# Altium PCB PIAR_MainBoard.PcbDoc (part 1 of 3)
Units mil, origin at the board's own origin, x right, y up, seen from the top; angles counter-clockwise.
Board outline 3543.31 x 2165.35 mil, 2 copper layers (Top Layer, Bottom Layer), stack 61.811 mil thick; 79 components, 51 nets, 291 pads, 72 vias.
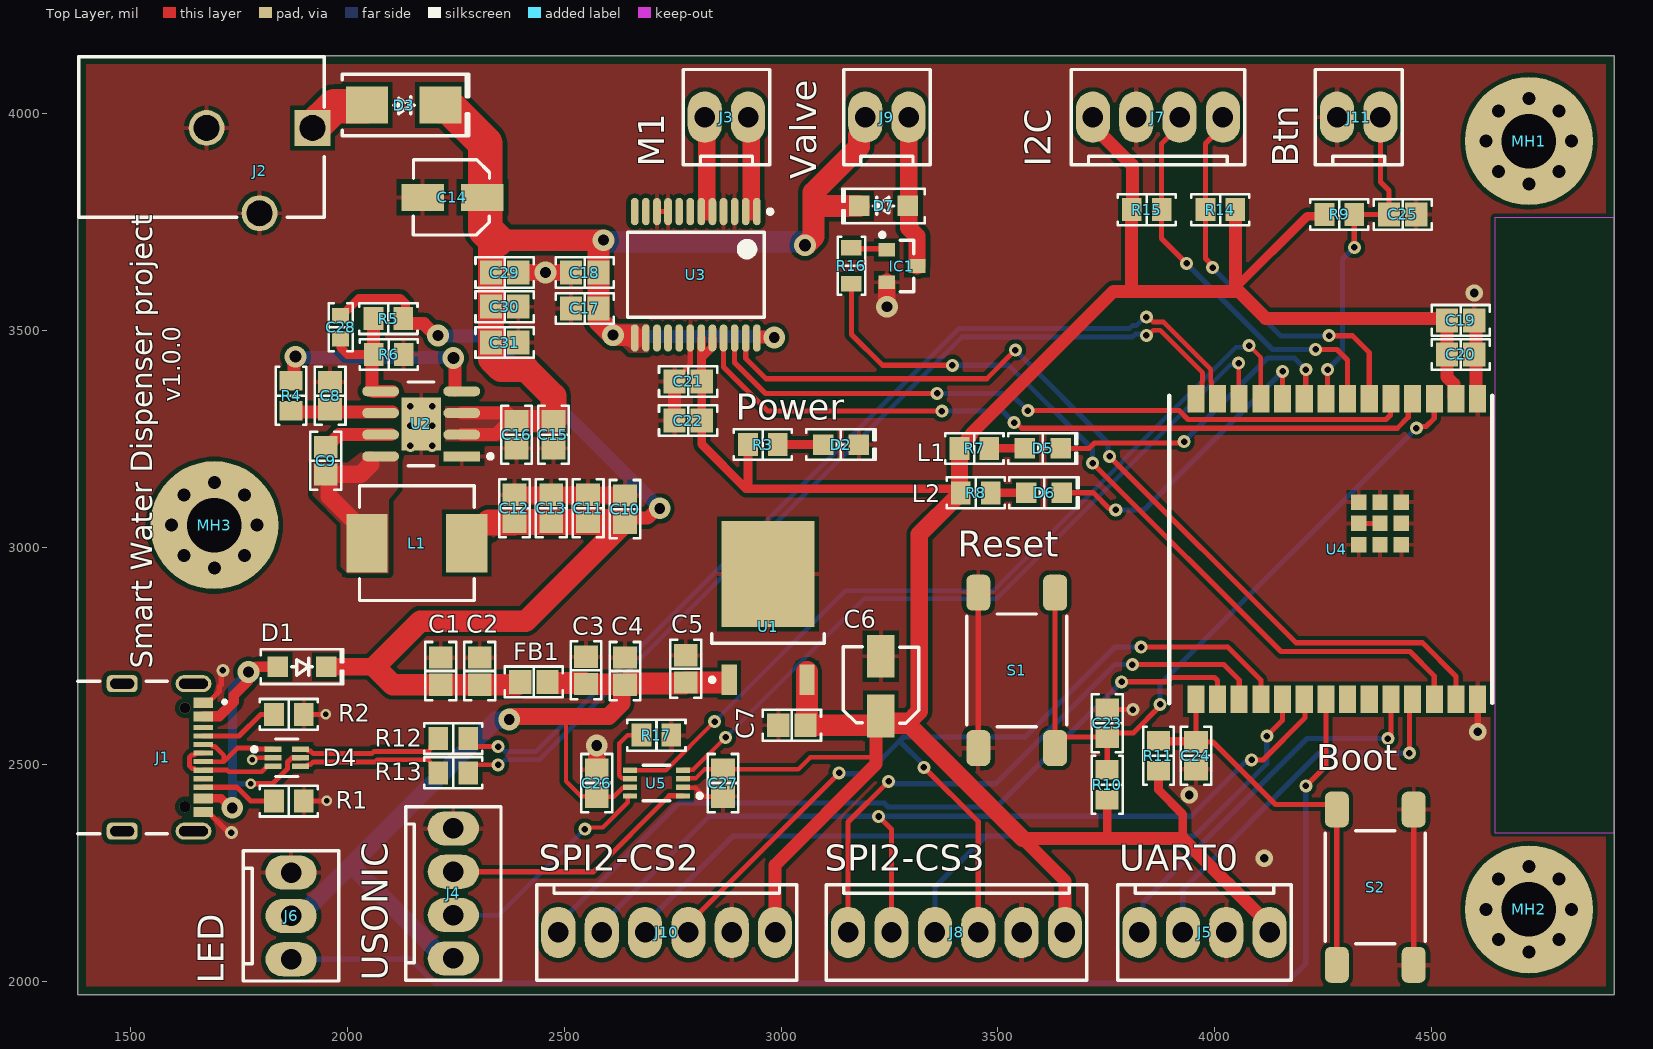
[diagram p0: Top Layer view]
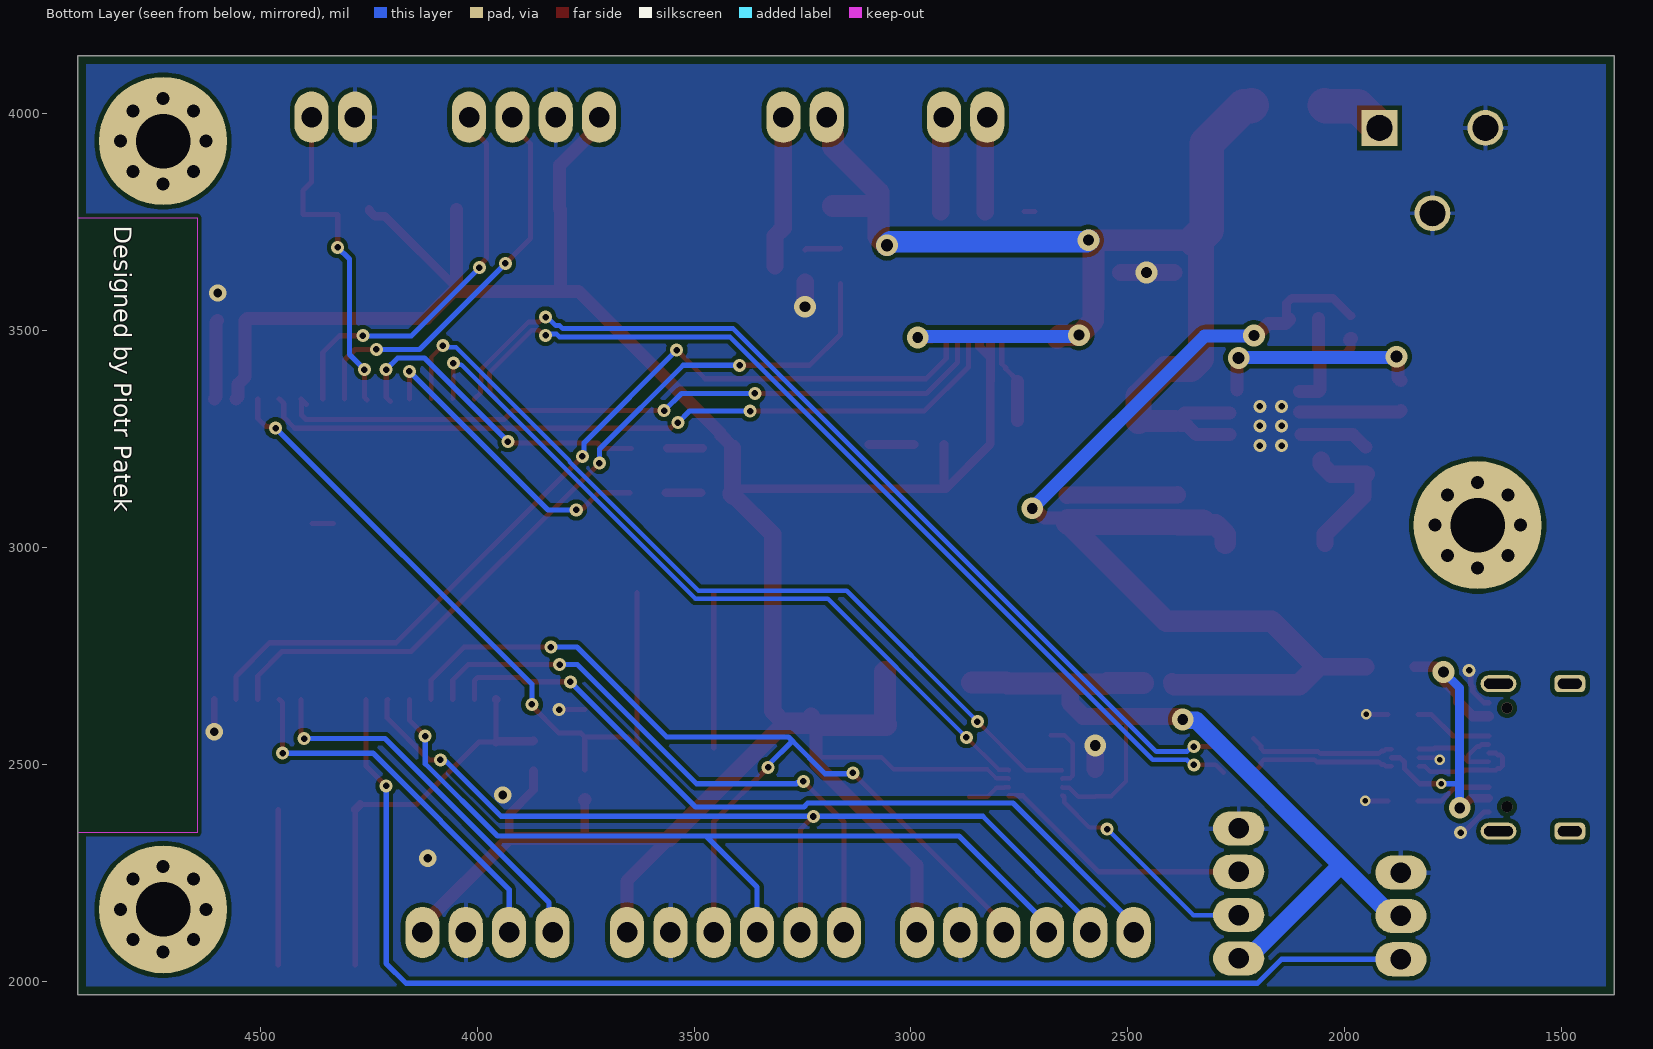
[diagram p1: Bottom Layer view, seen from below]
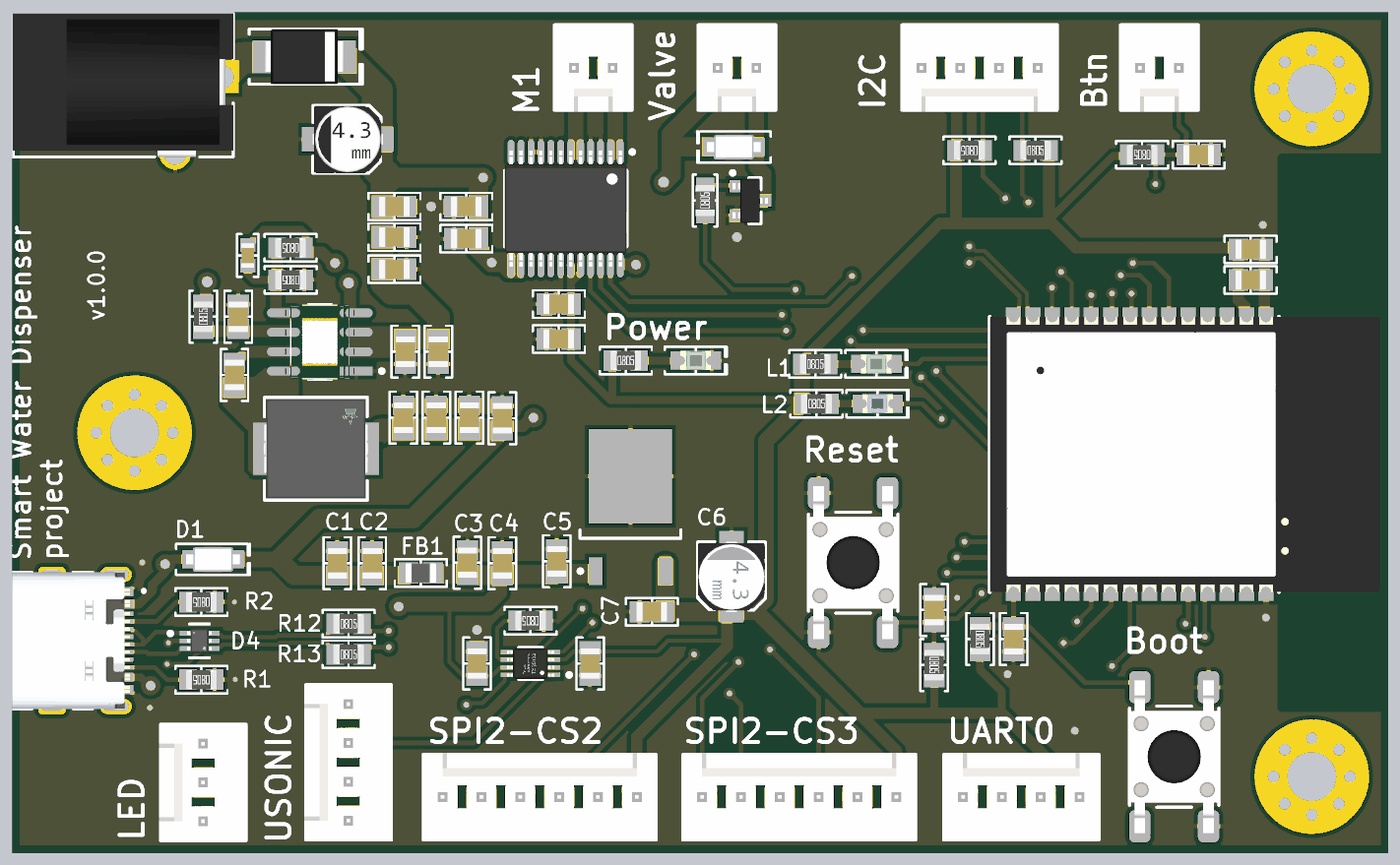
[diagram p3: 3D render of the assembled board from above, using the file's embedded part models]

## Layer stack, top to bottom
Top Solder: solder mask 0.3937, Solder Resist, Dk 3.5
Top Layer: signal copper 1.378
Dielectric 1: dielectric 59.0551, FR-4, Dk 4.5
Bottom Layer: signal copper 1.378
Bottom Solder: solder mask 0.3937, Solder Resist, Dk 3.5

## Board outline
1377.95,1968.5 4921.26,1968.5 4921.26,4133.86 1377.95,4133.86

## Design rules (kind name [scope] priority, off if disabled: settings)
Clearance ClearanceMountingHole [InComponentClass('MountingHoles')] p1: gap=10 ignorepadtopadclearanceinfootprint=TRUE except(12: Arc-Hole Track-Hole; 20: Arc-THPad Track-THPad SMDPad-THPad THPad-THPad THPad-Via THPad-Fill THPad-Poly THPad-Region THPad-Text THPad-Hole)
Clearance OutsideLayersClearance [OnOutside] p2: gap=10 ignorepadtopadclearanceinfootprint=TRUE except(3.94: Arc-SMDPad Track-SMDPad; 8: Arc-Arc Arc-Track Track-Track SMDPad-SMDPad; 12: Arc-THPad Track-THPad SMDPad-THPad THPad-Via; 18: THPad-THPad)
Clearance InnerLayersClearance [All] p3: gap=10 ignorepadtopadclearanceinfootprint=TRUE except(8: Arc-Arc Arc-Track Arc-SMDPad Track-Track Track-SMDPad SMDPad-SMDPad; 12: Arc-THPad Arc-Hole Track-THPad Track-Hole SMDPad-THPad THPad-Via THPad-Fill THPad-Poly THPad-Region Via-Via; 18: THPad-THPad)
DiffPairsRouting [InDifferentialPair('USB_CONN_D')] p1: maxlimit=8 minlimit=8 mostfreqgap=8 toplayer_minwidth=11.07 toplayer_maxwidth=11.07 toplayer_prefwidth=11.07 bottomlayer_minwidth=11.07 bottomlayer_maxwidth=11.07 bottomlayer_prefwidth=11.07 maxuncoupledlength=500
DiffPairsRouting DiffPairsRouting_1 [InDifferentialPair('USB_D')] p2: maxlimit=8 minlimit=8 mostfreqgap=8 toplayer_minwidth=11.07 toplayer_maxwidth=11.07 toplayer_prefwidth=11.07 bottomlayer_minwidth=11.07 bottomlayer_maxwidth=11.07 bottomlayer_prefwidth=11.07 maxuncoupledlength=500
DiffPairsRouting DiffPairsRouting_2 [InDifferentialPair('USB_D_R')] p3: maxlimit=8 minlimit=8 mostfreqgap=8 toplayer_minwidth=11.07 toplayer_maxwidth=11.07 toplayer_prefwidth=11.07 bottomlayer_minwidth=11.07 bottomlayer_maxwidth=11.07 bottomlayer_prefwidth=11.07 maxuncoupledlength=500
HoleSize [All] p1: absolutevalues=TRUE maxlimit=196.85 minlimit=11.81 maxpercent=80.000 minpercent=20.000
HoleToHoleClearance PadToPadClearance [IsPad] p1: gap=17.72 allowstackedmicrovias=TRUE
HoleToHoleClearance [All] p2: gap=10 allowstackedmicrovias=TRUE
MinimumSolderMaskSliver [All] p1: minsoldermaskwidth=3.94
PolygonConnect PolygonConnect_1 [InNetClass('Power')] p1: connectstyle=Direct reliefconductorwidth=10 reliefentries=4 polygonreliefangle="90 Angle" airgapwidth=10
PolygonConnect PowerPolygonConnect [InComponentClass('PowerComponents') or (IsVia and (InNetClass('HighPowerNets') or InNetClass('DirectConnectionPolygonNets'))) Or InPadClass('ThermalPads')] p2: connectstyle=Direct reliefconductorwidth=10 reliefentries=4 polygonreliefangle="90 Angle" airgapwidth=10
PolygonConnect PolygonConnectGNDVia [InNet('GND') vs IsVia] p3: connectstyle=Direct reliefconductorwidth=10 reliefentries=4 polygonreliefangle="90 Angle" airgapwidth=10
PolygonConnect [All] p4: connectstyle=Relief reliefconductorwidth=10 reliefentries=4 polygonreliefangle="90 Angle" airgapwidth=10
RoutingVias [All] p1: holewidth=12 width=24 viastyle="Through Hole" minholewidth=12 minwidth=24 maxholewidth=50 maxwidth=50
SilkToSilkClearance [All] p1: silktosilkclearance=5.91
SilkToSolderMaskClearance [IsText] p1: minsilkscreentomaskgap=5.91 clearancetoexposedcopper=TRUE
SolderMaskExpansion [InNetClass('HighPowerNets')] p1: expansion=1.97 istentingtop=FALSE
SolderMaskExpansion TantedViasMaskExpansion [IsVia And (Not InNetClass('HighPowerNets') or IsBlindVia)] p2: expansion=4 istentingtop=TRUE
SolderMaskExpansion PadsMaskExpansion [All] p3: expansion=2 istentingtop=FALSE
SupplyNets "Schematic Supply Nets_3" [InNet('+5V')] p1: voltage=0.000
SupplyNets "Schematic Supply Nets_2" [InNet('+12V')] p2: voltage=0.000
SupplyNets "Schematic Supply Nets_1" [InNet('+3.3V')] p3: voltage=0.000
SupplyNets "Schematic Supply Nets_11" [InNet('GND')] p4: voltage=0.000
Width [All] p1: maxlimit=100 minlimit=8 preferedwidth=10 minimp=50.000000 maximp=50.000000 favimp=50.000000
Width Width2 [InNet('3V3')] p2: maxlimit=40 minlimit=10 preferedwidth=20
Width Width3 [InNet('3.3VA')] p3: maxlimit=40 minlimit=10 preferedwidth=20
24 further rules are at their usual default settings.

## Classes and differential pairs
component class Motherboard: C17 C18 C19 C20 C21 C22 C23 C24 C25 C26 C27 D5 D6 D7 IC1 J3 J4 J5 J6 J7 J8 J9 J10 J11 R7 R8 R9 R10 R11 R12 R13 R14 R15 R16 R17 S1 S2 U3 U4 U5
component class ConnectionsAndPower: C1 C2 C3 C4 C5 C6 C7 C8 C9 C10 C11 C12 C13 C14 C15 C16 C28 C29 C30 C31 D1 D2 D3 D4 FB1 J1 J2 L1 MH1 MH2 MH3 R1 R2 R3 R4 R5 R6 U1 U2
differential pair USB_D_R: +USB_D_R_P -USB_D_R_N
differential pair USB_D: +USB_D_P -USB_D_N
differential pair USB_CONN_D: +USB_CONN_D_P -USB_CONN_D_N

## Components (designator, comment, footprint, x,y, rotation, side; value= is the part's Value field where it differs from the comment)
C1 "47 µF" "CAP 0805_2012" 2215,2715 r270 top
C2 "47 µF" "CAP 0805_2012" 2305,2715 r270 top
C3 "47 µF" "CAP 0805_2012" 2550,2716.5 r270 top
C4 "47 µF" "CAP 0805_2012" 2640,2715 r270 top
C5 "0.33µF" "CAP 0805_2012" 2780,2720 r270 top
C6 "10uF" "CAP ALSMD POLY 4.3MM H5.5MM" 3230,2680 r90 top value=10µF
C7 "0.22 µF" "CAP 0805_2012" 3025,2590 r0 top
C8 "1µF" "CAP 0805_2012" 1960,3350 r270 top
C9 "0.1 µF" "CAP 0805_2012" 1950,3200 r90 top
C10 "22 µF" "CAP 0805_2012" 2640,3088.5 r270 top
C11 "22 µF" "CAP 0805_2012" 2555,3090 r270 top
C12 "22 µF" "CAP 0805_2012" 2385,3090 r270 top
C13 "22 µF" "CAP 0805_2012" 2470,3090 r270 top
C14 "47 µF" "CAP ALSMD 4.3MM H5.4MM" 2242.13,3807.09 r180 top
C15 "10 µF" "CAP 0805_2012" 2475,3260 r90 top
C16 "0.22 µF" "CAP 0805_2012" 2390,3260 r90 top
C17 "0.1 µF" "CAP 0805_2012" 2547.24,3551.18 r180 top
C18 "10 µF" "CAP 0805_2012" 2547.24,3633.86 r0 top
C19 "22 µF" "CAP 0805_2012" 4566.93,3523.62 r0 top
C20 "0.1 µF" "CAP 0805_2012" 4566.93,3444.88 r0 top
C21 "10 µF" "CAP 0805_2012" 2785.35,3382.68 r0 top
C22 "0.1 µF" "CAP 0805_2012" 2785.35,3292.68 r180 top
C23 "0.1 µF" "CAP 0805_2012" 3751.97,2594.49 r270 top
C24 "0.1 µF" "CAP 0805_2012" 3956.69,2519.68 r90 top
C25 "0.1 µF" "CAP 0805_2012" 4433.07,3767.72 r180 top
C26 "0.1 µF" "CAP 0805_2012" 2574.8,2456.69 r90 top
C27 "0.1 µF" "CAP 0805_2012" 2866.14,2456.69 r90 top
C28 "0.1 µF" "CAP 0603_1608" 1984.25,3507.87 r90 top
C29 "22 µF" "CAP 0805_2012" 2362.2,3633.86 r180 top
C30 "22 µF" "CAP 0805_2012" 2362.2,3555.12 r180 top
C31 "22 µF" "CAP 0805_2012" 2362.2,3472.44 r180 top
D1 "STPS2H100ZF" SOD123F 1895,2725 r0 top
D2 "Green" "LED 0805_2012 GREEN" 3137.99,3237.2 r0 top
D3 "STTH4R02UY" "DO214AA SMB" 2130,4020 r0 top
D4 "USBLC6-2P6" FP-SOT-666-MFG 1860,2515 r0 top
D5 "Green" "LED 0805_2012 GREEN" 3603.31,3228.35 r0 top
D6 "Blue" "LED 0805_2012 BLUE" 3606.3,3125.98 r0 top
D7 "RF071MM2STR" SOD123F 3236.22,3787.4 r180 top
FB1 "120 Ohms @ 100MHz" "FER 0805_2012" 2430,2690 r0 top
IC1 "BSR202NL6327HTSA1" "INFINEON SOT-23-3" 3278.46,3648.82 r0 top
J1 "USB4105-GF-A-120" USB4105-GF-A-120 1480.32,2515.75 r270 top
J2 "PJ-102AH" "CUI PJ-102AH" 1663.39,3955.71 r90 top
J3 "M1" "MOLEX KK 0022272021" 2874.02,3992.13 r0 top
J4 "USONIC" "MOLEX KK 0022272041" 2244.09,2202.17 r270 top
J5 "UART1" "MOLEX KK 0022272041" 3976.38,2112.2 r180 top
J6 "LED1" "MOLEX KK 0022272031" 1870.08,2150.2 r270 top
J7 "DISPLAY1" "MOLEX KK 0022272041" 3868.9,3992.13 r0 top
J8 "NFC1" "MOLEX KK 0022272061" 3404.53,2112.2 r180 top
J9 "VALVE1" "MOLEX KK 0022272021" 3244.09,3992.13 r0 top
J10 "NFC2" "MOLEX KK 0022272061" 2736.22,2112.2 r180 top
J11 "Button" "MOLEX KK 0022272021" 4331.89,3992.13 r0 top
L1 "8.2uH" FP-IHLP-2525CZ-FP_2_413x3-MFG 2160,3010 r0 top
MH1 "M3 Mounting Hole" M3_MOUNTING_HOLE 4724.41,3937.01 r0 top
MH2 "M3 Mounting Hole" M3_MOUNTING_HOLE 4724.41,2165.35 r0 top
MH3 "M3 Mounting Hole" M3_MOUNTING_HOLE 1692.91,3051.18 r0 top
R1 "5.1k" "RES 0805_2012" 1865,2415 r180 top
R2 "5.1k" "RES 0805_2012" 1865,2615 r180 top
R3 "470" "RES 0805_2012" 2957.99,3237.2 r0 top
R4 "100k" "RES 0805_2012" 1870,3350 r90 top
R5 "100k" "RES 0805_2012" 2094.49,3527.56 r180 top
R6 "24.9k" "RES 0805_2012" 2095,3445 r180 top
R7 "470" "RES 0805_2012" 3445.83,3228.35 r0 top
R8 "47" "RES 0805_2012" 3448.82,3125.98 r0 top
R9 "10k" "RES 0805_2012" 4287.4,3767.72 r180 top
R10 "10k" "RES 0805_2012" 3751.97,2452.76 r270 top
R11 "10k" "RES 0805_2012" 3870.08,2519.68 r270 top
R12 "22" "RES 0805_2012" 2244.09,2559.06 r0 top
R13 "22" "RES 0805_2012" 2244.09,2480.32 r0 top
R14 "4k7" "RES 0805_2012" 4012.95,3778.74 r0 top
R15 "4k7" "RES 0805_2012" 3842.95,3778.74 r180 top
R16 "160" "YAGEO RES 0805_2012" 3162.2,3649.45 r90 top
R17 "10k" "RES 0805_2012" 2712.6,2566.93 r180 top
S1 "FSM6JSMAASTR" "TE FSM6JSMA" 3543.31,2716.54 r180 top
S2 "FSM6JSMAASTR" "TE FSM6JSMA" 4370.08,2216.54 r180 top
U1 "LD29150DT33R" TO-252_L 2970,2860 r90 top
U2 "LMR33630ADDAR" FP-DDA0008J-IPC_B 2170,3285 r180 top
U3 "TB6612FNG" TOSH-SSOP-24_M 2803.23,3628.74 r270 top
U4 "ESP32-C6-WROOM-1" ESP32-C6-WROOM1 4273.62,3092.52 r270 top
U5 "TXS0102DCUR" FP-DCU0008A-MFG 2712.6,2456.69 r180 top

## Footprints (in the part's own frame and the unit in brackets; to place one, negate y for a bottom-side part, rotate by r counter-clockwise, add the part's x,y. Pads: shape width x height; smd on the part's side, far side on the other; paste and mask are expansions set on the pad)
"CAP 0603_1608" [mm] "Chip Capacitor, 2-Leads, Body 1.60x0.80mm, IPC Medium Density"
  rect 0.9x1 smd: 1(-0.675,0) 2(0.675,0)
  silkscreen extent -1.4,-0.7 1.4,0.7, body extent -0.8,-0.41 0.8,0.41, height 0.82
"CAP 0805_2012" [mm] "Chip Capacitor, 2-Leads, Body 2.00x1.20mm, IPC Medium Density"
  rect 1.3x1.4 smd: 1(-0.8,0) 2(0.8,0)
  silkscreen extent -1.7,-0.9 1.7,0.9, body extent -1,-0.64 1,0.64, height 1.26
"CAP ALSMD 4.3MM H5.4MM" [mm] "Aluminum Electrolytic Capacitor, Body 4.30x4.30x5.40mm, IPC Low Density"
  rect 2.5x1.6 smd: 1(-1.75,0) 2(1.75,0)
  silkscreen extent -2.17,-2.21 2.3,2.2, body extent -2.3,-2.2 2.3,2.2, height 5.4
"CAP ALSMD POLY 4.3MM H5.5MM" [mm] "Aluminum Polymer Capacitor, Body 4.30x4.30x5.50mm, IPC Low Density"
  rect 2.5x1.6 smd: 1(-1.75,0) 2(1.75,0)
  silkscreen extent -2.17,-2.21 2.3,2.2, body extent -2.3,-2.2 2.3,2.2, height 5.5
"CUI PJ-102AH" [mm] "DC Barrel Jack W/ Switch 2.0x5.5"
  rect 2.1x2.1 hole 1.5: 1(0.3,-6.5)
  round 2.1 hole 1.5: 2(0.3,-0.3) 3(-4.7,-3.4)
  silkscreen extent -4.92,-7.2 4.47,7.2, body extent -4.92,-7.2 4.47,7.2, height 11
"DO214AA SMB" [mm] "Molded Diode, 2-Leads, Body 4.31x3.62mm, IPC Medium Density"
  rect 2.45x2.15 smd: 1(-2.15,0) 2(2.15,0)
  silkscreen extent -3.6,-1.8 3.8,1.8, body extent -2.6,-1.8 2.6,1.8, height 2.4
ESP32-C6-WROOM1 [mm]
  rect 1.6x1 smd: 1(-6.35,8.45) 2(-6.35,7.18) 3(-6.35,5.91) 4(-6.35,4.64) 5(-6.35,3.37) 6(-6.35,2.1) 7(-6.35,0.83) 8(-6.35,-0.44) 9(-6.35,-1.71) 10(-6.35,-2.98) 11(-6.35,-4.25) 12(-6.35,-5.52) 13(-6.35,-6.79) 14(-6.35,-8.06) 15(11.25,-8.06) 16(11.25,-6.79) 17(11.25,-5.52) 18(11.25,-4.25) 19(11.25,-2.98) 20(11.25,-1.71) 21(11.25,-0.44) 22(11.25,0.83) 23(11.25,2.1) 24(11.25,3.37) 25(11.25,4.64) 26(11.25,5.91) 27(11.25,7.18) 28(11.25,8.45)
  rect 0.9x0.9 smd: 29(-0.305,3.98) 29(-0.305,2.73) 29(-0.305,1.48) 29(0.945,3.98) 29(0.945,2.73) 29(0.945,1.48) 29(2.195,3.98) 29(2.195,1.48) 29(2.195,2.73)
  silkscreen extent -6.54,-9.61 11.47,9.31, body extent -6.54,-9.6 11.48,15.9, height 3.1
"FER 0805_2012" [mm] "Chip Ferrite, 2-Leads, Body 2.00x1.20mm, IPC Medium Density"
  rect 1.3x1.4 smd: 1(-0.8,0) 2(0.8,0)
  silkscreen extent -1.7,-0.9 1.7,0.9, body extent -1,-0.64 1,0.64, height 1.26
FP-DCU0008A-MFG [mm]
  rect 0.8x0.3 smd paste-1000 mask+0: 1(-1.55,0.75) 2(-1.55,0.25) 3(-1.55,-0.25) 4(-1.55,-0.75) 5(1.55,-0.75) 6(1.55,-0.25) 7(1.55,0.25) 8(1.55,0.75)
  silkscreen extent -2.65,-1.05 0.77,1.05, body extent -2.05,-1.3 2.05,1.3, height 0.25
FP-DDA0008J-IPC_B [mm]
  rect 2.153x0.582 smd paste+0 mask+0: 1(-2.377,1.905)
  rrect100% 2.153x0.582 smd paste+0 mask+0: 2(-2.377,0.635) 3(-2.377,-0.635) 4(-2.377,-1.905) 5(2.377,-1.905) 6(2.377,-0.635) 7(2.377,0.635) 8(2.377,1.905)
  rect 2.3x3.1 smd paste-1000 mask+0: 9(0,0)
  silkscreen extent -4.18,-2.45 0.75,2.45, body extent -3.7,-2.7 3.7,2.7, height 0.25
FP-IHLP-2525CZ-FP_2_413x3-MFG [mil]
  rect 95x135 smd paste+0 mask+0: 1(-115,0) 2(115,0)
  silkscreen extent -132,-132 132,132, body extent -166,-136 166,136, height 10
FP-SOT-666-MFG [mm]
  rect 0.99x0.3 smd paste+0 mask+0: 1(-0.805,0.5) 2(-0.805,0) 3(-0.805,-0.5) 4(0.805,-0.5) 5(0.805,0) 6(0.805,0.5)
  silkscreen extent -2.02,-1.1 0.65,1.1, body extent -1.4,-0.95 1.4,0.95, height 0.25
"INFINEON SOT-23-3" [mm] "SOT23, 3-Leads, Body 2.90x2.40mm, Pitch 0.95mm, IPC Medium Density"
  rect 0.972x0.802 smd: 1(-0.885,0.95) 2(-0.885,-0.95) 3(0.885,0)
  silkscreen extent -1.27,-1.5 0.7,1.95, body extent -1.16,-1.45 1.16,1.45, height 1
"LED 0805_2012 BLUE" [mm] "Chip Diode, 2-Leads, Body 2.00x1.25mm, IPC Medium Density"
  rect 1.2x1.2 smd: 1(-1.05,0) 2(1.05,0)
  silkscreen extent -2.03,-0.9 2.03,0.9, body extent -1,-0.62 1,0.63, height 0.9
"LED 0805_2012 GREEN" [mm] "Chip Diode, 2-Leads, Body 2.00x1.25mm, IPC Medium Density"
  rect 1.2x1.2 smd: 1(-1.05,0) 2(1.05,0)
  silkscreen extent -2.03,-0.9 2.03,0.9, body extent -1,-0.62 1,0.63, height 0.9
M3_MOUNTING_HOLE [mil]
  round 60 hole 30: 1(-98.43,0) 1(-69.61,-69.61) 1(-69.61,69.61) 1(0,-98.43) 1(0,98.43) 1(69.61,-69.61) 1(69.61,69.61) 1(98.43,0)
  round 295.28 hole 125.98: 1(0,0)
"MOLEX KK 0022272021" [mm]
  oval 2x3 hole 1.2: 1(-1.27,0) 2(1.27,0)
  silkscreen extent -2.54,-2.79 2.54,2.79, body extent -2.54,-2.9 2.54,2.9, height 11.7
"MOLEX KK 0022272031" [mm]
  oval 2x3 hole 1.2: 1(-2.54,0) 2(0,0) 3(2.54,0)
  silkscreen extent -3.81,-2.79 3.81,2.79, body extent -3.81,-2.9 3.81,2.9, height 11.7
"MOLEX KK 0022272041" [mm]
  oval 2x3 hole 1.2: 1(-3.81,0) 2(-1.27,0) 3(1.27,0) 4(3.81,0)
  silkscreen extent -5.08,-2.79 5.08,2.79, body extent -5.08,-2.9 5.08,2.9, height 11.7
"MOLEX KK 0022272061" [mm]
  oval 2x3 hole 1.2: 1(-6.35,0) 2(-3.81,0) 3(-1.27,0) 4(1.27,0) 5(3.81,0) 6(6.35,0)
  silkscreen extent -7.62,-2.79 7.62,2.79, body extent -7.62,-2.9 7.62,2.9, height 11.7
"RES 0805_2012" [mm] "Chip Resistor, 2-Leads, Body 2.00x1.25mm, IPC Medium Density"
  rect 1.15x1.35 smd: 1(-0.875,0) 2(0.875,0)
  silkscreen extent -1.7,-0.9 1.7,0.9, body extent -1,-0.62 1,0.63, height 0.6
SOD123F [mm] "SODFL, 2-Leads, Body 1.60x3.50mm, IPC Medium Density"
  rect 1.2x1.2 smd: 1(-1.43,0) 2(1.43,0)
  silkscreen extent -2.41,-1.02 2.41,1.02, body extent -1.75,-0.8 1.75,0.8, height 1.1
"TE FSM6JSMA" [mm]
  rrect50% 1.4x2.1 smd: 1(2.25,4.55) 2(2.25,-4.55) 3(-2.25,4.55) 4(-2.25,-4.55)
  silkscreen extent -2.92,-3.3 2.92,3.3, body extent -3,-5 3,5, height 7.11
TO-252_L [mm] "D-PAK, 4-Leads, Body 6.1x6.5mm, Pitch 2.28mm, Lead Span 9.7mm, IPC High Density"
  rect 1.8x0.9 smd: 1(-4.2,2.28) 3(-4.2,-2.28)
  rect 6.2x5.45 smd: 4(2,0)
  silkscreen extent -4.32,-3.3 -1.5,3.4, body extent -2.05,-3.3 4.15,3.3, height 2.4
TOSH-SSOP-24_M [mm] "SOP, 24-Leads, Body 8x5.8mm, Pitch 0.65mm, IPC Low Density"
  oval 1.6x0.45 smd: 1(-3.7,3.575) 2(-3.7,2.925) 3(-3.7,2.275) 4(-3.7,1.625) 5(-3.7,0.975) 6(-3.7,0.325) 7(-3.7,-0.325) 8(-3.7,-0.975) 9(-3.7,-1.625) 10(-3.7,-2.275) 11(-3.7,-2.925) 12(-3.7,-3.575) 13(3.7,-3.575) 14(3.7,-2.925) 15(3.7,-2.275) 16(3.7,-1.625) 17(3.7,-0.975) 18(3.7,-0.325) 19(3.7,0.325) 20(3.7,0.975) 21(3.7,1.625) 22(3.7,2.275) 23(3.7,2.925) 24(3.7,3.575)
  silkscreen extent -3.82,-4 2.5,4.47, body extent -3.8,-4 3.8,4, height 1.6
USB4105-GF-A-120 [mm]
  rect 0.6x1.15 smd: A1_B12(-3.2,4.755) A4_B9(-2.4,4.755) B1_A12(3.2,4.755) B4_A9(2.4,4.755)
  rect 0.3x1.15 smd: A5(-1.25,4.755) A6(-0.25,4.755) A7(0.25,4.755) A8(1.25,4.755) B5(1.75,4.755) B6(0.75,4.755) B7(-0.75,4.755) B8(-1.75,4.755)
  oval 1x2.1 hole 0.6 slot 1.7 at 90 deg: SH1(-4.32,4.18) SH2(4.32,4.18)
  rrect50% 1x1.8 hole 0.6 slot 1.4 at 90 deg: SH3(-4.32,0) SH4(4.32,0)
  round 0.65 hole 0.65 unplated: ""(-2.89,3.68) ""(2.89,3.68)
  silkscreen extent -4.47,-2.6 4.47,6.1, body extent -4.47,-2.6 4.47,5.11, height 3.31
"YAGEO RES 0805_2012" [mm] "Chip Resistor, 2-Leads, Body 2.00x1.25mm"
  rect 0.9x1.2 smd: 1(-1.05,0) 2(1.05,0)
  silkscreen extent -1.7,-0.8 1.7,0.8, body extent -1,-0.62 1,0.63, height 0.6

## Part data
C1 C2 C3 C4: library part CL21A476MQYNNNE, "CAP CER 47UF 6.3V X5R 0805", Capacitance=47u, Device Package="0805 (2012 Metric)", Manufacturer="Samsung Electro-Mechanics", Operating Temperature="-55°C ~ 85°C", Supplier Part Number 1=1276-1852-1-ND, Temperature Coefficient=X5R, Tolerance=±20%, Voltage - Rated=6.3V, Applications="General Purpose", ComponentLink1Description=Datasheet, ComponentLink1URL=http://www.samsungsem.com/kr/support/product-search/mlcc/CL21A476MQYNNNE.jsp, ComponentLink2Description="DigiKey Link", ComponentLink2URL=https://www.digikey.com/en/products/detail/samsung-electro-mechanics/CL21A476MQYNNNE/3887510, lastupdated="09/02/2024 20:16:07", Lifecycle Status=Active, Minimum Order=1, Mounting Type="Surface Mount, MLCC", Package / Case="0805 (2012 Metric)", Packaging=TapeAndReel, Part Number=CL21A476MQYNNNE, Part Status=Active, partid=3143, price=0.04, Series=CL, Size / Dimension="0.079\" L x 0.049\" W (2.00mm x 1.25mm)", Supplier 1=DigiKey, Thickness (Max)="0.057\" (1.45mm)"
C5: library part 08055C334JAT2A, "CAP CER 0.33UF 50V X7R 0805", Capacitance=0.33u, Device Package="0805 (2012 Metric)", Manufacturer="AVX Corporation", Operating Temperature="-55°C ~ 125°C", Supplier Part Number 1=478-10554-1-ND, Temperature Coefficient=X7R, Tolerance=±5%, Voltage - Rated=50V, Applications="General Purpose", ComponentLink1Description=Datasheet, ComponentLink1URL=http://datasheets.avx.com/X7RDielectric.pdf, ComponentLink2Description="DigiKey Link", ComponentLink2URL=http://digikey.com/product-detail/en/avx-corporation/08055C334JAT2A/478-10554-1-ND/6797428, lastupdated="02/09/2020 01:04:40", Lifecycle Status=Active, Minimum Order=1, Mounting Type="Surface Mount, MLCC", Package / Case="0805 (2012 Metric)", Packaging=TapeAndReel, Part Number=08055C334JAT2A, Part Status=Active, partid=3295, price=0.14, Series=-, Size / Dimension="0.079\" L x 0.049\" W (2.00mm x 1.25mm)", Supplier 1=DigiKey, Thickness (Max)="0.037\" (0.94mm)"
C6: library part 10SVP10M, "CAP ALUM POLY 10UF 20% 10V SMD", Capacitance=10µF, Device Package="Radial, Can - SMD", ESR (Equivalent Series Resistance)=22mOhm, Lifetime @ Temp.="2000 Hrs @ 105°C", Manufacturer="Panasonic Electronic Components", Operating Temperature="-55°C ~ 105°C", Ripple Current @ High Frequency="700mA @ 100kHz", Ripple Current @ Low Frequency="35mA @ 120Hz", Supplier Part Number 1=P16427CT-ND, Tolerance=±20%, Voltage - Rated=10V, Applications="General Purpose", ComponentLink1Description=Datasheet, ComponentLink1URL=http://industrial.panasonic.com/www-cgi/jvcr13pz.cgi?E+CI+4+AAB8008+10SVP10M+8+WW, ComponentLink2Description="DigiKey Link", ComponentLink2URL=http://digikey.com/product-detail/en/panasonic-electronic-components/10SVP10M/P16427CT-ND/4204209, Height - Seated (Max)="0.217\" (5.50mm)", lastupdated="02/09/2020 01:22:02", Lifecycle Status=Active, Minimum Order=1, Mounting Type="Surface Mount", Package / Case="Radial, Can - SMD", Packaging=TapeAndReel, Part Number=10SVP10M, Part Status=Active, partid=1855, price=0.35, Series="OS-CON™, SVP", Size / Dimension="0.157\" Dia (4.00mm)", Supplier 1=DigiKey, Surface Mount Land Size="0.169\" L x 0.169\" W (4.30mm x 4.30mm)", Type=Polymer
C7 C16: library part C0805C224J1REC7800, "CAP CER 0805 220NF 100V X7R 5%", Capacitance=220nF, Device Package="0805 (2012 Metric)", Manufacturer=KEMET, Operating Temperature="-55°C ~ 125°C", Supplier Part Number 1=399-C0805C224J1REC7800CT-ND, Temperature Coefficient=X7R, Tolerance=±5%, Voltage - Rated=100V, Applications="ESD Protection", ComponentLink1Description=Datasheet, ComponentLink1URL=https://api.kemet.com/component-edge/download/datasheet/C0805C224J1REC7800.pdf, ComponentLink2Description="DigiKey Link", ComponentLink2URL=https://www.digikey.com/en/products/detail/kemet/C0805C224J1REC7800/8643769, lastupdated="09/02/2024 20:15:02", Lifecycle Status=Active, Minimum Order=1, Mounting Type="Surface Mount, MLCC", Package / Case="0805 (2012 Metric)", Packaging=TapeAndReel, Part Number=C0805C224J1REC7800, Part Status=Active, partid=31561, price=0.04, Series="ESD SMD Comm X7R", Size / Dimension="0.079\" L x 0.049\" W (2.00mm x 1.25mm)", Supplier 1=DigiKey, Thickness (Max)="0.055\" (1.40mm)"
C8: library part 08055C105K4Z2A, "CAP CER 1UF 50V X7R 0805", Capacitance=1uF, Device Package="0805 (2012 Metric)", Manufacturer="AVX Corporation", Operating Temperature="-55°C ~ 125°C", Ratings=AEC-Q200, Supplier Part Number 1=478-9557-1-ND, Temperature Coefficient=X7R, Tolerance=±10%, Voltage - Rated=50V, Applications="Automotive, Boardflex Sensitive", ComponentLink1Description=Datasheet, ComponentLink1URL=http://datasheets.avx.com/FlexitermMLCC.pdf, ComponentLink2Description="DigiKey Link", ComponentLink2URL=http://digikey.com/product-detail/en/avx-corporation/08055C105K4Z2A/478-9557-1-ND/5322895, Features="Soft Termination", lastupdated="02/09/2020 01:04:41", Lifecycle Status=Active, Minimum Order=1, Mounting Type="Surface Mount, MLCC", Package / Case="0805 (2012 Metric)", Packaging=TapeAndReel, Part Number=08055C105K4Z2A, Part Status=Active, partid=2983, price=0.09, Series=FLEXITERM®, Size / Dimension="0.079\" L x 0.049\" W (2.00mm x 1.25mm)", Supplier 1=DigiKey, Thickness (Max)="0.055\" (1.40mm)"
C9 C17 C20 C22 C23 C24 C25 C26 C27: library part CC0805MRX7R9BB104, "CAP CER 0.1UF 50V X7R 0805", Capacitance=100nF, Device Package="0805 (2012 Metric)", Manufacturer=Yageo, Operating Temperature="-55°C ~ 125°C", Supplier Part Number 1=311-4351-1-ND, Temperature Coefficient=X7R, Tolerance=±20%, Voltage - Rated=50V, Applications="General Purpose", ComponentLink1Description=Datasheet, ComponentLink1URL=https://www.yageo.com/upload/media/product/productsearch/datasheet/mlcc/UPY-GPHC_X7R_6.3V-to-50V_18.pdf, ComponentLink2Description="DigiKey Link", ComponentLink2URL=https://www.digikey.com/en/products/detail/yageo/CC0805MRX7R9BB104/5884281, lastupdated="09/02/2024 20:16:09", Lifecycle Status=Active, Minimum Order=1, Mounting Type="Surface Mount, MLCC", Package / Case="0805 (2012 Metric)", Packaging=TapeAndReel, Part Number=CC0805MRX7R9BB104, Part Status=Active, partid=2475, price=0.01, Series=CC, Size / Dimension="0.079\" L x 0.049\" W (2.00mm x 1.25mm)", Supplier 1=DigiKey, Thickness (Max)="0.037\" (0.95mm)"
C10 C11 C12 C13 C29 C30 C31: library part CL21A226KOQNNNE, "CAP CER 22UF 16V X5R 0805", Capacitance=22uF, Device Package="0805 (2012 Metric)", Manufacturer="Samsung Electro-Mechanics", Operating Temperature="-55°C ~ 85°C", Supplier Part Number 1=1276-6526-1-ND, Temperature Coefficient=X5R, Tolerance=±10%, Voltage - Rated=16V, Applications="General Purpose", ComponentLink1Description=Datasheet, ComponentLink1URL=http://www.samsungsem.com/kr/support/library/product-catalog/mlcc.jsp, ComponentLink2Description="DigiKey Link", ComponentLink2URL=https://www.digikey.com/en/products/detail/samsung-electro-mechanics/CL21A226KOQNNNE/5961010, lastupdated="09/02/2024 20:16:07", Lifecycle Status=Active, Minimum Order=1, Mounting Type="Surface Mount, MLCC", Package / Case="0805 (2012 Metric)", Packaging=TapeAndReel, Part Number=CL21A226KOQNNNE, Part Status=Active, partid=3004, price=0.06, Series=CL, Size / Dimension="0.079\" L x 0.049\" W (2.00mm x 1.25mm)", Supplier 1=DigiKey, Thickness (Max)="0.055\" (1.40mm)"
C14: library part EMVA6R3ADA470MD55G, "CAP ALUM 47UF 20% 6.3V SMD", Device Package="Radial, Can - SMD", Lifetime @ Temp.="2000 Hrs @ 85°C", Manufacturer="United Chemi-Con", Operating Temperature="-40°C ~ 85°C", Ripple Current @ High Frequency="35.64 mA @ 100 kHz", Ripple Current @ Low Frequency="33 mA @ 120 Hz", Supplier Part Number 1=565-2056-1-ND, Tolerance=±20%, Voltage - Rated="6.3 V", Applications="General Purpose", Capacitance="47 µF", ComponentLink1Description=Datasheet, ComponentLink1URL=http://www.chemi-con.co.jp/cgi-bin/CAT_DB/SEARCH/cat_db_al.cgi?e=e&j=p&pdfname=mva, ComponentLink2Description="DigiKey Link", ComponentLink2URL=https://www.digikey.com/en/products/detail/united-chemi-con/EMVA6R3ADA470MD55G/756703, Height - Seated (Max)="0.205\" (5.20mm)", lastupdated="03/06/2024 19:53:00", Lifecycle Status=Active, Minimum Order=1, Mounting Type="Surface Mount", Package / Case="Radial, Can - SMD", Packaging=TapeAndReel, Part Number=EMVA6R3ADA470MD55G, Part Status=Active, partid=7038, Polarization=Polar, price=0.11, Series="Alchip™- MVA", Size / Dimension="0.157\" Dia (4.00mm)", Supplier 1=DigiKey, Surface Mount Land Size="0.169\" L x 0.169\" W (4.30mm x 4.30mm)"
C15 C18 C21: library part C2012X6S1C106K125AC, "CAP CER 10UF 16V X6S 0805", Capacitance=10uF, Device Package="0805 (2012 Metric)", Manufacturer="TDK Corporation", Operating Temperature="-55°C ~ 105°C", Supplier Part Number 1=445-7611-1-ND, Temperature Coefficient=X6S, Tolerance=±10%, Voltage - Rated=16V, Applications="General Purpose", ComponentLink1Description=Datasheet, ComponentLink1URL=https://product.tdk.com/info/en/catalog/datasheets/mlcc_commercial_general_en.pdf?ref_disty=digikey, ComponentLink2Description="DigiKey Link", ComponentLink2URL=https://www.digikey.com/en/products/detail/tdk-corporation/C2012X6S1C106K125AC/2733046, Features="Low ESL", lastupdated="09/02/2024 20:16:08", Lifecycle Status=Active, Minimum Order=1, Mounting Type="Surface Mount, MLCC", Package / Case="0805 (2012 Metric)", Packaging=TapeAndReel, Part Number=C2012X6S1C106K125AC, Part Status=Active, partid=2995, price=0.06, Series=C, Size / Dimension="0.079\" L x 0.049\" W (2.00mm x 1.25mm)", Supplier 1=DigiKey, Thickness (Max)="0.057\" (1.45mm)"
C19: library part CL21A226KOQNNNG, "CAP CER 22UF 16V X5R 0805", Capacitance="22 uF", Device Package="0805 (2012 Metric)", Manufacturer="Samsung Electro-Mechanics", Operating Temperature="-55°C ~ 85°C", Supplier Part Number 1=1276-7092-1-ND, Temperature Coefficient=X5R, Tolerance=±10%, Voltage - Rated=16V, Applications="General Purpose", ComponentLink1Description=Datasheet, ComponentLink1URL=//media.digikey.com/pdf/Data%20Sheets/Samsung%20PDFs/CL21A226KOQNNNG_Spec.pdf, ComponentLink2Description="DigiKey Link", ComponentLink2URL=https://www.digikey.com/en/products/detail/samsung-electro-mechanics/CL21A226KOQNNNG/3894433, lastupdated="09/02/2024 20:16:07", Lifecycle Status=Active, Minimum Order=1, Mounting Type="Surface Mount, MLCC", Package / Case="0805 (2012 Metric)", Packaging=TapeAndReel, Part Number=CL21A226KOQNNNG, Part Status=Active, partid=3000, price=0.06, Series=CL, Size / Dimension="0.079\" L x 0.049\" W (2.00mm x 1.25mm)", Supplier 1=DigiKey, Thickness (Max)="0.055\" (1.40mm)"
C28: library part CL10B104KA8NNNC, "CAP CER 0.1UF 25V X7R 0603", Capacitance=100nF, Device Package="0603 (1608 Metric)", Manufacturer="Samsung Electro-Mechanics", Operating Temperature="-55°C ~ 125°C", Supplier Part Number 1=1276-1006-1-ND, Temperature Coefficient=X7R, Tolerance=±10%, Voltage - Rated=25V, Applications="General Purpose", ComponentLink1Description=Datasheet, ComponentLink1URL=http://www.samsungsem.com/kr/support/product-search/mlcc/CL10B104KA8NNNC.jsp, ComponentLink2Description="DigiKey Link", ComponentLink2URL=https://www.digikey.com/en/products/detail/samsung-electro-mechanics/CL10B104KA8NNNC/3886664, lastupdated="09/02/2024 20:10:20", Lifecycle Status=Active, Minimum Order=1, Mounting Type="Surface Mount, MLCC", Package / Case="0603 (1608 Metric)", Packaging=TapeAndReel, Part Number=CL10B104KA8NNNC, Part Status=Active, partid=9793, price=0.01, Series=CL, Size / Dimension="0.063\" L x 0.031\" W (1.60mm x 0.80mm)", Supplier 1=DigiKey, Thickness (Max)="0.035\" (0.90mm)"
D1: "DIODE SCHOTTKY 100V 2A SOD123F", Current - Average Rectified (Io)=2A, Current - Reverse Leakage @ Vr="1 µA @ 100 V", Manufacturer=STMicroelectronics, Operating Temperature - Junction="-40°C ~ 175°C", Package / Case=SOD-123F, Supplier Part Number 1=497-17152-1-ND, Voltage - DC Reverse (Vr) (Max)="100 V", Voltage - Forward (Vf) (Max) @ If="960 mV @ 4 A", ComponentLink1Description=Datasheet, ComponentLink1URL=http://www.st.com/content/ccc/resource/technical/document/datasheet/group3/e0/1c/dc/bb/11/47/42/2a/DM00321023/files/DM00321023.pdf/jcr:content/translations/en.DM00321023.pdf, ComponentLink2Description="DigiKey Link", ComponentLink2URL=https://www.digikey.com/en/products/detail/stmicroelectronics/STPS2H100ZF/6709839, Diode Type=Schottky, lastupdated="03/06/2024 19:54:58", Lifecycle Status=Active, Minimum Order=1, Mounting Type="Surface Mount", Packaging=TapeAndReel, Part Number=STPS2H100ZF, Part Status=Active, partid=2348, price=0.06, Series=ECOPACK®2, Speed="Fast Recovery =< 500ns, > 200mA (Io)", Supplier 1=DigiKey, Supplier Device Package=SOD-123F
D2 D5: library part APHCM2012CGCK-F01, "LED GREEN CLEAR CHIP SMD", Current - Test=20mA, Device Package="0805 (2012 Metric)", Lens Color=Colorless, Manufacturer=Kingbright, Millicandela Rating=50mcd, Supplier Device Package="Chip LED", Supplier Part Number 1=754-1094-1-ND, Voltage - Forward (Vf) (Typ)=2.1V, Color=Green, ComponentLink1Description=Datasheet, ComponentLink1URL=http://www.kingbrightusa.com/images/catalog/SPEC/APHCM2012CGCK-F01.pdf, ComponentLink2Description="DigiKey Link", ComponentLink2URL=https://www.digikey.com/en/products/detail/kingbright/APHCM2012CGCK-F01/1747492, Configuration=Standard, Height (Max)=0.40mm, lastupdated="03/06/2024 20:00:30", Lens Size="1.30mm x 1.25mm", Lens Style="Rectangle with Flat Top", Lens Transparency=Clear, Lifecycle Status=Active, Minimum Order=1, Mounting Type="Surface Mount", Package / Case="0805 (2012 Metric)", Packaging=TapeAndReel, Part Number=APHCM2012CGCK-F01, Part Status=Active, partid=241, price=0.05, Series=-, Size / Dimension="2.00mm L x 1.25mm W", Supplier 1=DigiKey, Viewing Angle=110°, Wavelength - Dominant=570nm, Wavelength - Peak=574nm
D3: "DIODE GEN PURP 200V 4A SMB", Current - Average Rectified (Io)=4A, Current - Reverse Leakage @ Vr="3 µA @ 200 V", Manufacturer=STMicroelectronics, Operating Temperature - Junction="-40°C ~ 175°C", Package / Case="DO-214AA, SMB", Supplier Device Package=SMB, Supplier Part Number 1=497-11105-1-ND, Voltage - DC Reverse (Vr) (Max)="200 V", Voltage - Forward (Vf) (Max) @ If="1.05 V @ 4 A", ComponentLink1Description=Datasheet, ComponentLink1URL=http://www.st.com/content/ccc/resource/technical/document/datasheet/f7/b0/f4/2f/8e/1a/4d/1d/CD00270577.pdf/files/CD00270577.pdf/jcr:content/translations/en.CD00270577.pdf, ComponentLink2Description="DigiKey Link", ComponentLink2URL=https://www.digikey.com/en/products/detail/stmicroelectronics/STTH4R02UY/2612178, Diode Type=Standard, lastupdated="03/06/2024 19:53:56", Lifecycle Status=Active, Minimum Order=1, Mounting Type="Surface Mount", Packaging=TapeAndReel, Part Number=STTH4R02UY, Part Status=Active, partid=297, price=0.11, Reverse Recovery Time (trr)="30 ns", Series=Q, Speed="Fast Recovery =< 500ns, > 200mA (Io)", Supplier 1=DigiKey
D4: library part CMP-12225-000058-1, "TVS DIODE 5.25V 17V SOT666", Breakdown Voltage=6V, Capacitance=3.5pF, Case/Package=SOT-666, Clamping Voltage=17V, Leakage Current=150nA, Max Operating Temperature=125°C, Min Operating Temperature=-40°C, Operating Supply Voltage=5V, Package Quantity=1, Peak Pulse Current=5A, Power Line Protection=Yes, Test Current=1mA, Contact Plating=Tin, Depth=1.3mm, Direction=Unidirectional, Element Configuration=Dual, ESD Protection=Yes, Height=0.6mm, Lead Free="Lead Free", Length=1.7mm, Max Breakdown Voltage=6V, Max Reverse Leakage Current=150nA, Min Breakdown Voltage=6V, Mount="Surface Mount", Number of Bidirectional Channels=2, Number of Channels=2, Number of Elements=1, Number of Pins=6, Packaging="Tape and Reel", Polarity=Unidirectional, Radiation Hardening=No, REACH SVHC="No SVHC", Reverse Breakdown Voltage=6V, Reverse Standoff Voltage=5V, Termination=SMD/SMT, Width=1.3mm, Working Voltage=5V
D6: library part SMLMN2BCTT86C, "LED BLUE CLEAR 2012 SMD", Current - Test=5mA, Device Package="0805 (2012 Metric)", Lens Color=Colorless, Manufacturer="Rohm Semiconductor", Millicandela Rating=36mcd, Supplier Device Package=2012(0805), Supplier Part Number 1=846-1207-1-ND, Voltage - Forward (Vf) (Typ)=2.9V, Color=Blue, ComponentLink1Description=Datasheet, ComponentLink1URL=https://www.rohm.com/datasheet/SML-M13UT, ComponentLink2Description="DigiKey Link", ComponentLink2URL=https://www.digikey.com/en/products/detail/rohm-semiconductor/SMLMN2BCTT86C/6057236, Configuration=Standard, Height (Max)=0.90mm, lastupdated="03/06/2024 19:58:02", Lens Size="1.40mm x 0.85mm", Lens Style="Rectangle with Flat Top", Lens Transparency=Clear, Lifecycle Status=Active, Minimum Order=1, Mounting Type="Surface Mount", Package / Case="0805 (2012 Metric)", Packaging=TapeAndReel, Part Number=SMLMN2BCTT86C, Part Status=Active, partid=754, price=0.12, Series=-, Size / Dimension="2.00mm L x 1.25mm W", Supplier 1=DigiKey, Wavelength - Dominant=470nm
D7: "DIODE GEN PURP 200V 700MA PMDU", Current - Average Rectified (Io)=700mA, Current - Reverse Leakage @ Vr="10 µA @ 200 V", Manufacturer="Rohm Semiconductor", Operating Temperature - Junction="150°C (Max)", Package / Case=SOD-123F, Supplier Device Package=PMDU, Supplier Part Number 1=RF071MM2SCT-ND, Voltage - DC Reverse (Vr) (Max)="200 V", Voltage - Forward (Vf) (Max) @ If="850 mV @ 700 mA", ComponentLink1Description=Datasheet, ComponentLink1URL=https://www.rohm.com/datasheet/RF071MM2S/rf071mm2s-e, ComponentLink2Description="DigiKey Link", ComponentLink2URL=https://www.digikey.com/en/products/detail/rohm-semiconductor/RF071MM2STR/5001870, Diode Type=Standard, lastupdated="03/06/2024 19:54:58", Lifecycle Status=Active, Minimum Order=1, Mounting Type="Surface Mount", Packaging=TapeAndReel, Part Number=RF071MM2STR, Part Status=Active, partid=1071, price=0.08, Reverse Recovery Time (trr)="25 ns", Series=-, Speed="Fast Recovery =< 500ns, > 200mA (Io)", Supplier 1=DigiKey
FB1: library part BBUP00201209121Y00, "EMI BEAD FILETER", Current Rating (Max)=5A, DC Resistance (DCR) (Max)=20mOhm, Device Package="0805 (2012 Metric)", Manufacturer="Chilisin Electronics", Operating Temperature="-55°C ~ 125°C", Supplier Part Number 1=2184-BBUP00201209121Y00CT-ND, ComponentLink1Description=Datasheet, ComponentLink1URL=https://www.chilisin.com/upload/media/product/emi_bead/file/BBUP_Series.pdf, ComponentLink2Description="DigiKey Link", ComponentLink2URL=http://digikey.com/product-detail/en/chilisin-electronics/BBUP00201209121Y00/2184-BBUP00201209121Y00CT-ND/10509429, Impedance @ Frequency="120 Ohms @ 100MHz", lastupdated="03/06/2024 19:52:19", Lifecycle Status=Active, Minimum Order=1, Mounting Type="Surface Mount", Number of Lines=1, Package / Case="0805 (2012 Metric)", Packaging=Unknown, Part Number=BBUP00201209121Y00, Part Status=Active, partid=1880, price=0.04, Supplier 1=DigiKey
IC1: "MOSFET N-CH 20V 3.8A SC59", Current - Continuous Drain (Id) @ 25°C="3.8A (Ta)", Drain to Source Voltage (Vdss)="20 V", Drive Voltage (Max Rds On,  Min Rds On)="2.5V, 4.5V", Input Capacitance (Ciss) (Max) @ Vds="1147 pF @ 10 V", Manufacturer="Infineon Technologies", Operating Temperature="-55°C ~ 150°C (TJ)", Package / Case="TO-236-3, SC-59, SOT-23-3", Power Dissipation (Max)="500mW (Ta)", Supplier Device Package=PG-SC59-3, Supplier Part Number 1=BSR202NL6327HTSA1CT-ND, ComponentLink1Description=Datasheet, ComponentLink1URL=https://www.infineon.com/dgdl/BSR202N_Rev1.06.pdf?folderId=db3a3043156fd573011622e10b5c1f67&fileId=db3a3043156fd573011622e5576e1f72, ComponentLink2Description="DigiKey Link", ComponentLink2URL=https://www.digikey.com/en/products/detail/infineon-technologies/BSR202NL6327HTSA1/2080702, FET Type=N-Channel, Gate Charge (Qg) (Max) @ Vgs="8.8 nC @ 4.5 V", lastupdated="03/06/2024 20:15:23", Lifecycle Status=Active, Minimum Order=1, Mounting Type="Surface Mount", Packaging=TapeAndReel, Part Number=BSR202NL6327HTSA1, Part Status=Active, price=0.15, Rds On (Max) @ Id, Vgs="21mOhm @ 3.8A, 4.5V", Series=OptiMOS™, Supplier 1=DigiKey, Technology="MOSFET (Metal Oxide)", Vgs (Max)=±12V, Vgs(th) (Max) @ Id="1.2V @ 30µA"
J1: "USB C socket; SMT; PIN: 16; top board mount; 5A"
J2: "CONN PWR JACK 2X5.5MM SOLDER", Current Rating (Amps)=5A, Manufacturer="CUI Devices", Material Flammability Rating="UL94 V-0", Supplier Part Number 1=CP-102AH-ND, Voltage - Rated=24VDC, Actual Diameter="0.079\" (2.00mm ID), 0.256\" (6.50mm OD)", ComponentLink1Description=Datasheet, ComponentLink1URL=https://www.cuidevices.com/product/resource/digikeypdf/pj-102ah.pdf, ComponentLink2Description="DigiKey Link", ComponentLink2URL=//digikey.com/product-detail/en/cui-devices/PJ-102AH/CP-102AH-ND/408448, Connector Type=Jack, Gender=Male, Industry Recognized Mating Diameter="2.00mm ID (0.079\"), 5.50mm OD (0.217\")", Internal Switch(s)="Single Switch, Normally Closed", lastupdated="16/12/2019 19:01:27", Lifecycle Status=0, Mating Length/Depth="0.354\" (9.00mm)", Minimum Order=1, Mounting Type="Through Hole, Right Angle", Number of Positions/Contacts="2 Conductors, 3 Contacts", Packaging=Tray, Part Number=PJ-102AH, Part Status=Active, price=0.76, Series=-, Shielding=Unshielded, Supplier 1=DigiKey, Termination=Solder
J3 J9 J11: library part 0022272021, "CONN HEADER VERT 2POS 2.54MM", Insulation Color=Natural, Manufacturer=Molex, Material Flammability Rating="UL94 V-0", Supplier Part Number 1=WM4111-ND, ComponentLink1Description=Datasheet, ComponentLink1URL=https://www.molex.com/pdm_docs/sd/022272021_sd.pdf, ComponentLink2Description="DigiKey Link", ComponentLink2URL=http://digikey.com/product-detail/en/molex/0022272021/WM4111-ND/1130577, Connector Type=Header, Contact Finish - Mating=Tin, Contact Finish - Post=Tin, Contact Finish Thickness - Mating="100.0µin (2.54µm)", Contact Length - Mating="0.295\" (7.49mm)", Contact Length - Post="0.140\" (3.56mm)", Contact Material=Brass, Contact Shape=Square, Contact Type="Male Pin", Fastening Type="Friction Lock", Insulation Height="0.461\" (11.70mm)", Insulation Material="Polyamide (PA), Nylon", lastupdated="12/01/2020 23:51:43", Lifecycle Status=Active, Minimum Order=1, Mounting Type="Through Hole", Number of Positions=2, Number of Positions Loaded=All, Number of Rows=1, Overall Contact Length="0.560\" (14.22mm)", Packaging=Bulk, Part Number=0022272021, Part Status=Active, partid=76, Pitch - Mating="0.100\" (2.54mm)", price=0.27, Series="KK 6410", Shrouding="Shrouded - 1 Wall", Style="Board to Cable/Wire", Supplier 1=DigiKey, Termination=Solder
J4 J5 J7: library part 0022272041, "CONN HEADER VERT 4POS 2.54MM", Insulation Color=Natural, Manufacturer=Molex, Material Flammability Rating="UL94 V-0", Supplier Part Number 1=WM4113-ND, ComponentLink1Description=Datasheet, ComponentLink1URL=https://www.molex.com/pdm_docs/sd/022272041_sd.pdf, ComponentLink2Description="DigiKey Link", ComponentLink2URL=http://digikey.com/product-detail/en/molex/0022272041/WM4113-ND/1130579, Connector Type=Header, Contact Finish - Mating=Tin, Contact Finish - Post=Tin, Contact Finish Thickness - Mating="100.0µin (2.54µm)", Contact Length - Mating="0.295\" (7.49mm)", Contact Length - Post="0.140\" (3.56mm)", Contact Material=Brass, Contact Shape=Square, Contact Type="Male Pin", Fastening Type="Friction Lock", Insulation Height="0.461\" (11.70mm)", Insulation Material="Polyamide (PA), Nylon", lastupdated="12/01/2020 23:52:05", Lifecycle Status=Active, Minimum Order=1, Mounting Type="Through Hole", Number of Positions=4, Number of Positions Loaded=All, Number of Rows=1, Overall Contact Length="0.560\" (14.22mm)", Packaging=Bulk, Part Number=0022272041, Part Status=Active, partid=78, Pitch - Mating="0.100\" (2.54mm)", price=0.40, Series="KK 6410", Shrouding="Shrouded - 1 Wall", Style="Board to Cable/Wire", Supplier 1=DigiKey, Termination=Solder
J6: library part 0022272031, "CONN HEADER VERT 3POS 2.54MM", Insulation Color=Natural, Manufacturer=Molex, Material Flammability Rating="UL94 V-0", Supplier Part Number 1=WM4112-ND, ComponentLink1Description=Datasheet, ComponentLink1URL=https://www.molex.com/pdm_docs/sd/022272031_sd.pdf, ComponentLink2Description="DigiKey Link", ComponentLink2URL=http://digikey.com/product-detail/en/molex/0022272031/WM4112-ND/1130578, Connector Type=Header, Contact Finish - Mating=Tin, Contact Finish - Post=Tin, Contact Finish Thickness - Mating="100.0µin (2.54µm)", Contact Length - Mating="0.295\" (7.49mm)", Contact Length - Post="0.140\" (3.56mm)", Contact Material=Brass, Contact Shape=Square, Contact Type="Male Pin", Fastening Type="Friction Lock", Insulation Height="0.461\" (11.70mm)", Insulation Material="Polyamide (PA), Nylon", lastupdated="12/01/2020 23:51:54", Lifecycle Status=Active, Minimum Order=1, Mounting Type="Through Hole", Number of Positions=3, Number of Positions Loaded=All, Number of Rows=1, Overall Contact Length="0.560\" (14.22mm)", Packaging=Bulk, Part Number=0022272031, Part Status=Active, partid=77, Pitch - Mating="0.100\" (2.54mm)", price=0.37, Series="KK 6410", Shrouding="Shrouded - 1 Wall", Style="Board to Cable/Wire", Supplier 1=DigiKey, Termination=Solder
J8 J10: library part 0022272061, "CONN HEADER VERT 6POS 2.54MM", Insulation Color=Natural, Manufacturer=Molex, Material Flammability Rating="UL94 V-0", Supplier Part Number 1=WM4115-ND, ComponentLink1Description=Datasheet, ComponentLink1URL=https://www.molex.com/pdm_docs/sd/022272061_sd.pdf, ComponentLink2Description="DigiKey Link", ComponentLink2URL=http://digikey.com/product-detail/en/molex/0022272061/WM4115-ND/1130581, Connector Type=Header, Contact Finish - Mating=Tin, Contact Finish - Post=Tin, Contact Finish Thickness - Mating="100.0µin (2.54µm)", Contact Length - Mating="0.295\" (7.49mm)", Contact Length - Post="0.140\" (3.56mm)", Contact Material=Brass, Contact Shape=Square, Contact Type="Male Pin", Fastening Type="Friction Lock", Insulation Height="0.461\" (11.70mm)", Insulation Material="Polyamide (PA), Nylon", lastupdated="12/01/2020 23:52:24", Lifecycle Status=Active, Minimum Order=1, Mounting Type="Through Hole", Number of Positions=6, Number of Positions Loaded=All, Number of Rows=1, Overall Contact Length="0.560\" (14.22mm)", Packaging=Bulk, Part Number=0022272061, Part Status=Active, partid=80, Pitch - Mating="0.100\" (2.54mm)", price=0.49, Series="KK 6410", Shrouding="Shrouded - 1 Wall", Style="Board to Cable/Wire", Supplier 1=DigiKey, Termination=Solder
L1: library part CMP-02424-000673-1, "Commercial Inductors, High Saturation Series 8.2uH 4A 68mΩ 20%", Case/Package=2525, Current Rating=4A, DC Resistance (DCR)=68mR, Inductance Tolerance=20%, Max DC Current=7.5A, Max Operating Temperature=125°C, Min Operating Temperature=-55°C, Package Quantity=2000, Self Resonant Frequency=5MHz, Test Frequency=100kHz, Contact Plating=Tin, Core Material=Metal, Depth=6.72mm, Height=3mm, Height - Seated (Max)=0.118inch, Inductance=8.2uH, Lead Free="Lead Free", Length=7.24mm, Military Standard=Not, Mount="Surface Mount", Number of Pins=2, Packaging="Tape and Reel", Radiation Hardening=No, RMS Current (Irms)=4A, Saturation Current=7.5A, Shielding=Shielded, Termination=SMD/SMT, Tolerance=20%, Width=6.47mm
R1 R2: library part ERA-6AED512V, "RES SMD 5.1K OHM 0.5% 1/8W 0805", Device Package="0805 (2012 Metric)", Manufacturer="Panasonic Electronic Components", Operating Temperature="-55°C ~ 155°C", Power (Watts)="0.125W, 1/8W", Ratings=AEC-Q200, Resistance="5.1 kOhms", Supplier Device Package=0805, Supplier Part Number 1=P123856CT-ND, Temperature Coefficient=±25ppm/°C, Tolerance=±0.5%, ComponentLink1Description=Datasheet, ComponentLink1URL=https://industrial.panasonic.com/cdbs/www-data/pdf/RDM0000/AOA0000C307.pdf, ComponentLink2Description="DigiKey Link", ComponentLink2URL=https://www.digikey.com/en/products/detail/panasonic-electronic-components/ERA-6AED512V/9373625, Composition="Thin Film", Features="Automotive AEC-Q200", Height - Seated (Max)="0.024\" (0.60mm)", lastupdated="08/02/2024 21:02:38", Lifecycle Status=Active, Minimum Order=1, Number of Terminations=2, Package / Case="0805 (2012 Metric)", Packaging=TapeAndReel, Part Number=ERA-6AED512V, Part Status=Active, partid=27812, price=0.04, Series=ERA-6A, Size / Dimension="0.079\" L x 0.049\" W (2.00mm x 1.25mm)", Supplier 1=DigiKey
R3 R7: library part CRGP0805F470R, "RES 470 OHM 1% 1/3W 0805", Device Package="0805 (2012 Metric)", Manufacturer="TE Connectivity Passive Product", Operating Temperature="-55°C ~ 155°C", Power (Watts)="0.333W, 1/3W", Resistance="470 Ohms", Supplier Device Package=0805, Supplier Part Number 1=A130473CT-ND, Temperature Coefficient=±100ppm/°C, Tolerance=±1%, ComponentLink1Description=Datasheet, ComponentLink1URL=https://www.te.com/commerce/DocumentDelivery/DDEController?Action=srchrtrv&DocNm=9-1773463-9&DocType=DS&DocLang=English, ComponentLink2Description="DigiKey Link", ComponentLink2URL=https://www.digikey.com/en/products/detail/te-connectivity-passive-product/CRGP0805F470R/8577075, Composition="Thick Film", Features="Pulse Withstanding", Height - Seated (Max)="0.026\" (0.65mm)", lastupdated="08/02/2024 21:02:34", Lifecycle Status=Active, Minimum Order=1, Number of Terminations=2, Package / Case="0805 (2012 Metric)", Packaging=TapeAndReel, Part Number=CRGP0805F470R, Part Status=Active, partid=28801, price=0.02, Series=CRGP, Size / Dimension="0.079\" L x 0.049\" W (2.00mm x 1.25mm)", Supplier 1=DigiKey
R4 R5: library part CPF0805B100KE, "RES SMD 100K OHM 0.1% 1/10W 0805", Device Package="0805 (2012 Metric)", Manufacturer="TE Connectivity Passive Product", Operating Temperature="-55°C ~ 155°C", Power (Watts)="0.1W, 1/10W", Resistance="100 kOhms", Supplier Device Package=0805, Supplier Part Number 1=A106042CT-ND, Temperature Coefficient=±25ppm/°C, Tolerance=±0.1%, ComponentLink1Description=Datasheet, ComponentLink1URL=https://www.te.com/commerce/DocumentDelivery/DDEController?Action=srchrtrv&DocNm=1773200&DocType=DS&DocLang=English, ComponentLink2Description="DigiKey Link", ComponentLink2URL=https://www.digikey.com/en/products/detail/te-connectivity-passive-product/CPF0805B100KE/2389788, Composition="Thin Film", Height - Seated (Max)="0.026\" (0.65mm)", lastupdated="08/02/2024 21:02:39", Lifecycle Status=Active, Minimum Order=1, Number of Terminations=2, Package / Case="0805 (2012 Metric)", Packaging=TapeAndReel, Part Number=CPF0805B100KE, Part Status=Active, partid=27729, price=0.09, Series="CPF, Neohm", Size / Dimension="0.079\" L x 0.049\" W (2.00mm x 1.25mm)", Supplier 1=DigiKey
R6: library part RNCF0805DTE24K9, "RES SMD 24.9K OHM 0.5% 1/4W 0805", Device Package="0805 (2012 Metric)", Manufacturer="Stackpole Electronics Inc", Operating Temperature="-55°C ~ 155°C", Power (Watts)="0.25W, 1/4W", Ratings=AEC-Q200, Resistance="24.9 kOhms", Supplier Device Package=0805, Supplier Part Number 1=738-RNCF0805DTE24K9CT-ND, Temperature Coefficient=±25ppm/°C, Tolerance=±0.5%, ComponentLink1Description=Datasheet, ComponentLink1URL=https://www.seielect.com/catalog/sei-rncf.pdf, ComponentLink2Description="DigiKey Link", ComponentLink2URL=https://www.digikey.com/en/products/detail/stackpole-electronics-inc/RNCF0805DTE24K9/6241929, Composition="Thin Film", Features="Automotive AEC-Q200", Height - Seated (Max)="0.026\" (0.65mm)", lastupdated="08/02/2024 21:02:37", Lifecycle Status=Active, Minimum Order=1, Number of Terminations=2, Package / Case="0805 (2012 Metric)", Packaging=TapeAndReel, Part Number=RNCF0805DTE24K9, Part Status=Active, partid=28005, price=0.01, Series=RNCF, Size / Dimension="0.079\" L x 0.049\" W (2.00mm x 1.25mm)", Supplier 1=DigiKey
R8: library part CRGP0805F47R, "RES 47 OHM 1% 1/3W 0805", Device Package="0805 (2012 Metric)", Manufacturer="TE Connectivity Passive Product", Operating Temperature="-55°C ~ 155°C", Power (Watts)="0.333W, 1/3W", Resistance="47 Ohms", Supplier Device Package=0805, Supplier Part Number 1=A130461CT-ND, Temperature Coefficient=±100ppm/°C, Tolerance=±1%, ComponentLink1Description=Datasheet, ComponentLink1URL=https://www.te.com/commerce/DocumentDelivery/DDEController?Action=srchrtrv&DocNm=9-1773463-9&DocType=DS&DocLang=English, ComponentLink2Description="DigiKey Link", ComponentLink2URL=https://www.digikey.com/en/products/detail/te-connectivity-passive-product/CRGP0805F47R/8577063, Composition="Thick Film", Features="Pulse Withstanding", Height - Seated (Max)="0.026\" (0.65mm)", lastupdated="08/02/2024 21:02:34", Lifecycle Status=Active, Minimum Order=1, Number of Terminations=2, Package / Case="0805 (2012 Metric)", Packaging=TapeAndReel, Part Number=CRGP0805F47R, Part Status=Active, partid=28763, price=0.02, Series=CRGP, Size / Dimension="0.079\" L x 0.049\" W (2.00mm x 1.25mm)", Supplier 1=DigiKey